# Allegro board INSOLADORA.brd
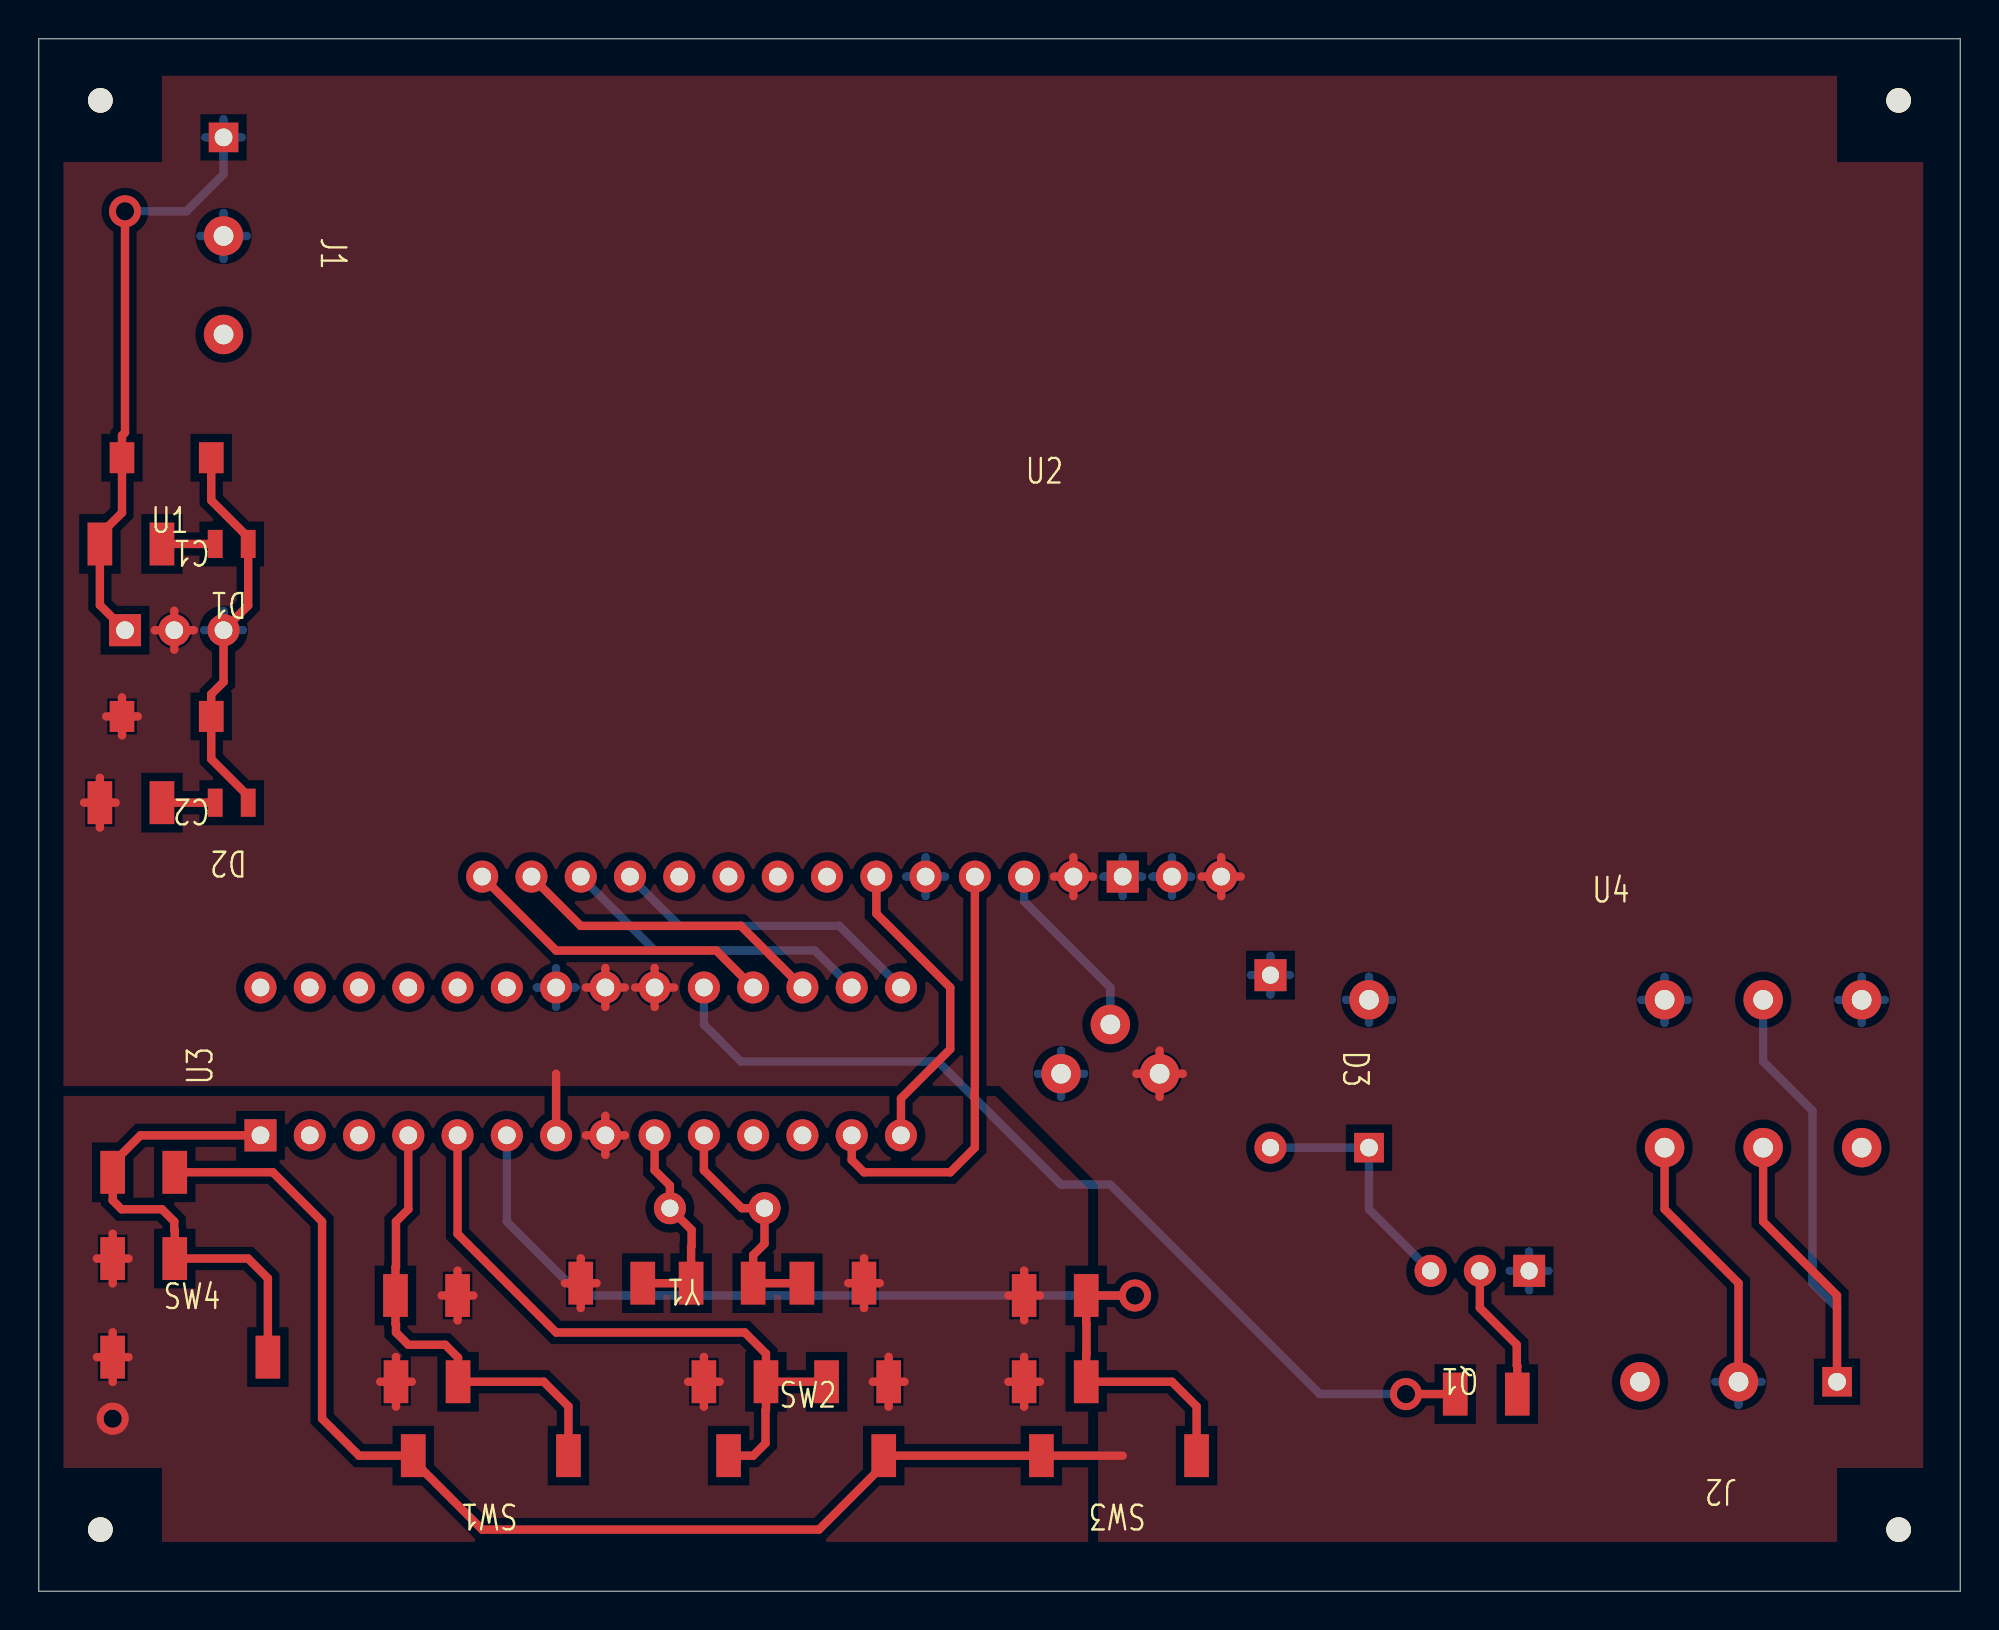
[diagram p0: board, top side]
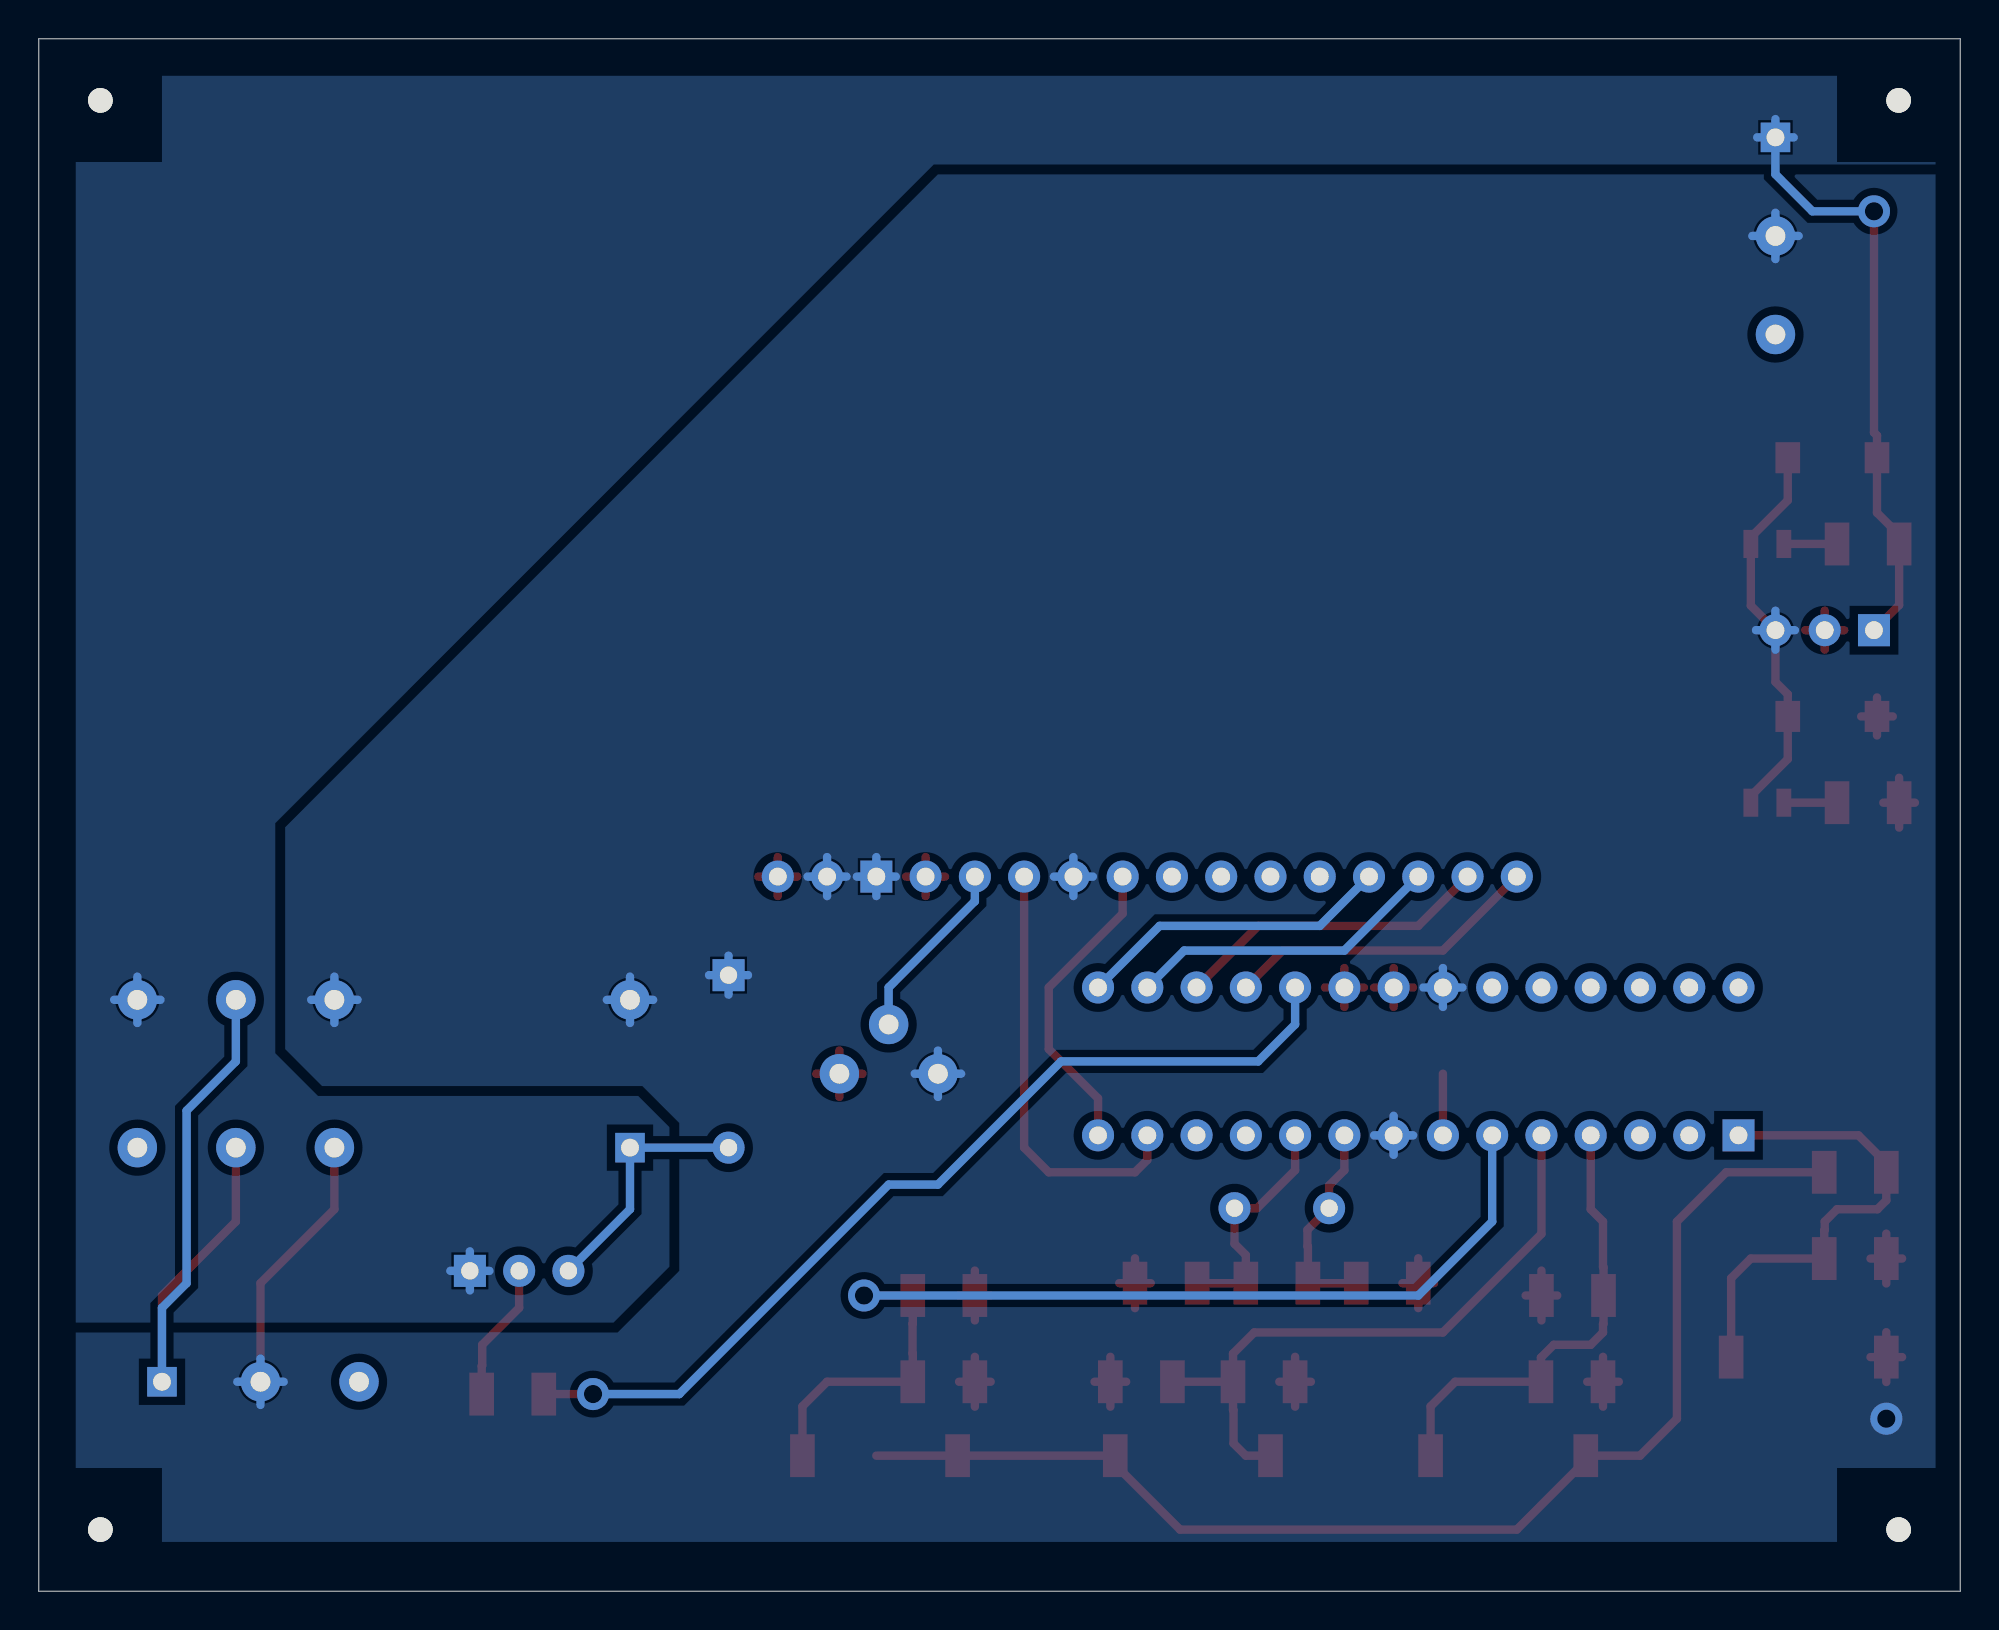
[diagram p1: board, bottom side, seen from below]

Outline 99.06 x 80.01 mm; copper layers: TOP, BOTTOM. Coordinates in mm from the lower left corner of the outline.
Outline path: 0,80.01 99.06,80.01 99.06,0 0,0 0,80.01

## Placement (name value [footprint] x y rotation side)
C1  0.33u  [SMD_CAPHB]  8.89 58.42 180 top
C2  0.1u  [SMD_CAPHB]  8.89 45.09 180 top
C3  100n  [SMDCAP_126X63]  3.81 17.15 0 top
C4  100n  [SMDCAP_126X63]  18.42 10.8 0 top
C5  100n  [SMDCAP_126X63]  43.81 10.8 180 top
C6  100n  [SMDCAP_126X63]  50.8 15.24 0 top
C7  22p  [SMDCAP_126X63]  27.94 15.88 0 top
C8  22p  [SMDCAP_126X63]  42.55 15.88 180 top
D1  1N6266/TO  [SMDLED_67X35]  10.8 53.98 180 top
D2  1N6266/TO  [SMDLED_67X35]  10.8 40.64 180 top
D3  d  [DIODO_350]  63.5 31.75 270 top
J1  POWER  [CON3]  9.52 74.93 270 top
J2  LEDS_UV  [CON3]  92.71 10.8 180 top
NOREF  -  [unnamed]  3.18 3.18 0 top
NOREF#2  -  [unnamed]  95.88 3.18 0 top
NOREF#3  -  [unnamed]  3.18 76.84 0 top
NOREF#4  -  [unnamed]  95.88 76.84 0 top
Q1  -  [BC547B]  76.84 16.51 180 top
R1  1k  [SMDRES_126X63]  6.35 40.64 180 top
R2  1k  [SMDRES_126X63]  6.35 53.98 180 top
R3  10k  [POT_MULTI]  52.7 26.67 0 top
R4  10k  [SMDRES_126X63]  3.81 21.59 0 top
R5  220  [SMDRES_126X63]  21.59 15.24 180 top
R6  220  [SMDRES_126X63]  34.29 10.8 0 top
R7  220  [SMDRES_126X63]  50.8 10.8 0 top
R8  1k  [SMDRES_126X63]  36.83 15.88 180 top
R9  10k  [SMDRES_126X63]  73.03 10.16 0 top
SW1  SW PUSHBUTTON  [SMD_PUSHBUTTON]  27.3 6.98 180 top
SW2  SW PUSHBUTTON  [SMD_PUSHBUTTON]  35.56 6.98 0 top
SW3  SW PUSHBUTTON  [SMD_PUSHBUTTON]  59.69 6.98 180 top
SW4  SW PUSHBUTTON  [SMD_PUSHBUTTON]  3.81 12.07 0 top
U1  LM7805C  [LM7805]  4.45 49.53 0 top
U2  LMB162H  [LMB162H_LCD]  55.88 36.83 0 top
U3  -  [ATMEGA328P]  11.43 23.5 90 top
U4  -  [RZ03_1C4_D005]  68.58 30.48 0 top
Y1  CRYSTAL 16 MHz  [CRISTAL16MHZ]  40.64 21.59 180 top

## Library data of the parts
C1 C2 = C_elect_0
C3-C8 = C
D1 D2 = 1N6266/TO_0
D3 = d_0
J1 J2 = CON3
Q1 = BC547B
R1 R2 R4-R9 = R
R3 = POT
SW1-SW4 = SW PUSHBUTTON
U1 = LM7805C
U2 = LMB162H_LCD_0
U3 = ATMEGA328P
U4 = RZ03_1C4_D005
Y1 = CRYSTAL

## Footprints (pads in the part's own frame, mm; a bottom-side part is the same pattern mirrored in y, then rotated)
ATMEGA328P
  rect 1.651x1.651 hole 0.914: 1(0,0)
  round 1.651 hole 0.914: 2(0,-2.54) 3(0,-5.08) 4(0,-7.62) 5(0,-10.16) 6(0,-12.7) 7(0,-15.24) 8(0,-17.78) 9(0,-20.32) 10(0,-22.86) 11(0,-25.4) 12(0,-27.94) 13(0,-30.48) 14(0,-33.02) 15(7.62,-33.02) 16(7.62,-30.48) 17(7.62,-27.94) 18(7.62,-25.4) 19(7.62,-22.86) 20(7.62,-20.32) 21(7.62,-17.78) 22(7.62,-15.24) 23(7.62,-12.7) 24(7.62,-10.16) 25(7.62,-7.62) 26(7.62,-5.08) 27(7.62,-2.54) 28(7.62,0)
BC547B
  rect 1.651x1.651 hole 0.889: 1(0,0)
  round 1.651 hole 0.889: 2(2.54,0) 3(5.08,0)
CON3
  rect 1.524x1.524 hole 0.914: 1(0,0)
  round 2.032 hole 1.016: 2(5.08,0) 3(10.16,0)
CRISTAL16MHZ
  round 1.651 hole 0.889: 1(3.226,1.85) 2(8.103,1.85)
DIODO_350
  rect 1.651x1.651 hole 0.889: 1(0,0)
  round 1.651 hole 0.889: 2(8.89,0)
LM7805
  rect 1.651x1.651 hole 0.914: 1(0,0)
  round 1.651 hole 0.914: 2(2.54,0) 3(5.08,0)
LMB162H_LCD
  rect 1.651x1.651 hole 0.914: 1(0,0)
  round 1.651 hole 0.914: 2(-2.54,0) 3(-5.08,0) 4(-7.62,0) 5(-10.16,0) 6(-12.7,0) 7(-15.24,0) 8(-17.78,0) 9(-20.32,0) 10(-22.86,0) 11(-25.4,0) 12(-27.94,0) 13(-30.48,0) 14(-33.02,0) 15(5.08,0) 16(2.54,0)
POT_MULTI
  round 2.032 hole 1.016: 1(0,0) 2(2.54,2.54) 3(5.08,0)
RZ03_1C4_D005
  rect 1.524x1.524 hole 0.914: 1(0,-7.62)
  round 2.032 hole 1.016: 2(15.24,-7.62) 3(20.32,-7.62) 4(25.4,-7.62) 5(25.4,0) 6(20.32,0) 7(15.24,0) 8(0,0)
SMD_CAPHB
  rect 1.27x1.6 smd: 1(0,0) 2(4.6,0)
SMD_PUSHBUTTON
  rect 1.27x2.21 smd: 1(0,0) 2(8.001,0)
SMDCAP_126X63
  rect 1.27x2.21 smd: 1(0,0) 2(3.2,0)
SMDLED_67X35
  rect 0.762x1.448 smd: 1(0,0) 2(1.702,0)
SMDRES_126X63
  rect 1.27x2.21 smd: 1(0,0) 2(3.2,0)
unnamed
  round 1.27 hole 3.962 unplated: (0,0)

## Nets
VCC: C2.2(+) R1.2 R3.3(2) R4.2 SW1.2 SW2.2 SW3.2 U1.2(OUT) U2.2(VDD) U2.15(BLK) U3.7(VCC) U3.20(AVCC) U3.21(AREF)
0: C1.1(-) C2.1(-) C3.1 C4.1 C5.1 C6.1 C7.1 C8.1 D1.1(CATHODE) D2.1(CATHODE) D3.1 J1.2 J2.2 R3.1 R5.1 R6.1 R7.1 SW4.1 U1.3(GND) U2.1(VSS) U2.5(R/W) U2.16(BLA) U3.8(GND1) U3.22(GND2) U4.7(12) U4.8(A2)
ATM_RSTN: C3.2 R4.1 SW4.2 U3.1(PC6)
CONTRAST: R3.2(T) U2.3(VO)
DATA_EN: U2.6(E) U3.14(PB0)
DB4: U2.11(DB4) U3.15(PB1)
DB5: U2.12(DB5) U3.16(PB2)
DB6: U2.13(DB6) U3.17(PB3)
DB7: U2.14(DB7) U3.18(PB4)
MIN: C4.2 R5.2 SW1.1 U3.4(PD2)
POWER: C1.2(+) J1.1 Q1.1(C) R2.2 U1.1(IN) U4.5(14)
POWER_LEDS: J2.1 U4.6(11)
REG_SEL: U2.4(RS) U3.13(PD7)
RELAY_CNTRL: R9.1 U3.19(PB5)
RELAY_CURRENT: D3.2 Q1.3(E) U4.1(A1)
SEG: C5.2 R6.2 SW2.1 U3.5(PD3)
START: C6.2 R7.2 SW3.1 U3.6(PD4)
XTAL1: C7.2 R8.2 U3.9(PB6) Y1.2
XTAL2: C8.2 R8.1 U3.10(PB7) Y1.1
N416775: Q1.2(B) R9.2
N4105391: D2.2(ANODE) R1.1
N4184300: D1.2(ANODE) R2.1

Pads without a net: J1 3; J2 3; U2 7 8 9 10; U3 2 3 11 12 23 24 25 26 27 28; U4 2 3 4

## Via types
v1: diameter 1.651, hole 0.94, TOP to BOTTOM, 4 vias

## Routing (per net, layer and track width the routed paths; a pad name or vN(x,y) marks a point on that pad's centre or on a via; arc(x,y) is an arc through that point)
VCC: length 100.3
  TOP w0.432: U1.2 7.99,49.53 ; U1.2 6.98,50.53 ; U1.2 5.98,49.53 ; U1.2 6.98,48.53 ; 59.96,36.83 U2.15 ; U2.15 60.96,35.83 ; U2.15 60.96,37.83 ; U2.15 61.96,36.83 ; 57.79,26.67 58.98,26.67 ; 57.79,26.67 57.79,25.48 ; 57.79,26.67 56.59,26.67 ; 57.79,26.67 57.79,27.86 ; U3.7 26.67,26.67 ; R1.2 3.15,41.92 ; R1.2 3.96,40.64 ; R1.2 3.15,39.36 ; R1.2 2.34,40.64 ; 28.21,31.12 U3.21 ; U3.21 29.21,30.11 ; U3.21 29.21,32.12 ; U3.21 30.21,31.12 ; U2.2 53.34,37.83 ; U2.2 54.34,36.83 ; U2.2 53.34,35.83 ; U2.2 52.34,36.83 ; C2.2 4.29,46.06 ; C2.2 4.29,44.11 ; C2.2 3.48,45.09 ; C2.2 5.1,45.09 ; 55.88,6.98 SW3.2 43.56,6.98 43.56,6.52 40.22,3.18 22.86,3.18 19.3,6.73 SW1.2 16.51,6.98 14.61,8.89 14.61,19.05 12.06,21.59 R4.2 ; U3.20 31.75,32.12 ; U3.20 30.75,31.12 ; U3.20 31.75,30.11 ; U3.20 32.75,31.12
0: length 131.7
  TOP w0.432: C4.1 18.42,12.08 ; C4.1 18.42,9.51 ; C4.1 19.23,10.8 ; C4.1 17.6,10.8 ; 49.99,15.24 C6.1 ; C6.1 50.8,16.52 ; C6.1 51.61,15.24 ; C6.1 50.8,13.96 ; C7.1 27.94,17.16 ; C7.1 28.75,15.88 ; C7.1 27.13,15.88 ; C7.1 27.94,14.59 ; 3.81,15.86 C3.1 ; C3.1 3,17.15 ; C3.1 4.62,17.15 ; C3.1 3.81,18.43 ; 49.99,10.8 R7.1 ; R7.1 51.61,10.8 ; R7.1 50.8,12.08 ; R7.1 50.8,9.51 ; C5.1 44.63,10.8 ; C5.1 43.81,12.08 ; C5.1 43,10.8 ; C5.1 43.81,9.51 ; D2.1 10.8,40.98 8.89,42.89 C2.1 8.89,46.23 9.52,46.86 U1.3 10.8,50.8 D1.1 10.8,54.32 8.89,56.22 C1.1 ; C8.1 43.36,15.88 ; C8.1 42.55,17.16 ; C8.1 42.55,14.59 ; C8.1 41.73,15.88 ; 34.29,9.51 R6.1 ; R6.1 34.29,12.08 ; R6.1 33.48,10.8 ; R6.1 35.1,10.8 ; R5.1 21.59,16.52 ; R5.1 22.4,15.24 ; R5.1 21.59,13.96 ; R5.1 20.78,15.24 ; J2.2 87.63,15.88 83.82,19.69 83.82,22.86 ; SW4.1 3.81,13.35 ; SW4.1 3.81,10.78 ; SW4.1 4.62,12.07 ; SW4.1 3,12.07 ; U3.8 29.21,24.5 ; U3.8 30.21,23.5 ; U3.8 29.21,22.49 ; U3.8 28.21,23.5
  BOTTOM w0.432: 82.63,30.48 U4.7 ; U4.7 83.82,31.67 ; U4.7 83.82,29.29 ; U4.7 85.01,30.48 ; U3.22 26.67,32.12 ; U3.22 26.67,30.11 ; U3.22 27.67,31.12 ; U3.22 25.67,31.12 ; 29.21,22.49 U3.8 ; U3.8 30.21,23.5 ; U3.8 28.21,23.5 ; U3.8 29.21,24.5 ; 8.33,69.85 J1.2 ; J1.2 9.52,71.04 ; J1.2 9.52,68.66 ; J1.2 10.72,69.85 ; 62.5,31.75 D3.1 ; D3.1 63.5,30.75 ; D3.1 64.5,31.75 ; D3.1 63.5,32.75 ; R3.1 53.9,26.67 ; R3.1 51.51,26.67 ; R3.1 52.7,25.48 ; R3.1 52.7,27.86 ; 86.44,10.8 J2.2 ; J2.2 88.82,10.8 ; J2.2 87.63,11.99 ; J2.2 87.63,9.6 ; 67.39,30.48 U4.8 ; U4.8 68.58,29.29 ; U4.8 69.77,30.48 ; U4.8 68.58,31.67 ; 9.52,48.53 U1.3 ; U1.3 9.52,50.53 ; U1.3 8.52,49.53 ; U1.3 10.53,49.53 ; 58.42,35.83 U2.16 ; U2.16 59.42,36.83 ; U2.16 58.42,37.83 ; U2.16 57.42,36.83 ; 54.88,36.83 U2.1 ; U2.1 55.88,37.83 ; U2.1 56.88,36.83 ; U2.1 55.88,35.83 ; U2.5 45.72,37.83 ; U2.5 46.72,36.83 ; U2.5 45.72,35.83 ; U2.5 44.72,36.83
  vias: v1(3.81,8.89)
ATM_RSTN: length 25
  TOP w0.432: U3.1 5.25,23.5 3.81,22.06 R4.1 3.81,20.14 4.27,19.69 6.35,19.69 6.98,19.05 6.98,18.62 7.01,18.59 C3.2 10.8,17.15 11.81,16.13 SW4.2
CONTRAST: length 9.5
  BOTTOM w0.432: U2.3 50.8,35.56 55.25,31.12 R3.2
DATA_EN: length 16
  TOP w0.432: U2.6 43.18,34.93 46.99,31.12 46.99,27.94 44.45,25.4 U3.14
DB4: length 16.3
  BOTTOM w0.432: U2.11 33.02,34.29 41.27,34.29 U3.15
DB5: length 16.3
  BOTTOM w0.432: U3.16 40.01,33.02 31.75,33.02 U2.12
DB6: length 16.3
  TOP w0.432: U3.17 36.2,34.29 27.94,34.29 U2.13
DB7: length 16.3
  TOP w0.432: U2.14 26.67,33.02 34.92,33.02 U3.18
MIN: length 24.2
  TOP w0.432: SW1.1 27.3,9.53 26.04,10.8 C4.2 21.62,12.04 20.96,12.7 19.05,12.7 18.42,13.34 18.42,13.77 18.39,13.79 R5.2 18.39,16.69 18.42,16.71 18.42,19.05 19.05,19.69 U3.4
POWER: length 42.1
  TOP w0.432: v1(4.45,71.12) 4.45,59.72 4.29,59.56 C1.2 4.29,55.59 3.15,54.44 R2.2 3.15,50.83 U1.1
  BOTTOM w0.432: J1.1 9.52,73.03 7.62,71.12 v1(4.45,71.12) ; J1.1 8.58,74.93 ; J1.1 10.47,74.93 ; J1.1 9.52,75.87 ; 93.98,29.29 U4.5 ; U4.5 95.17,30.48 ; U4.5 92.79,30.48 ; U4.5 93.98,31.67 ; 75.83,16.51 Q1.1 ; Q1.1 76.84,15.51 ; Q1.1 76.84,17.51 ; Q1.1 77.84,16.51
POWER_LEDS: length 34.9
  TOP w0.432: J2.1 92.71,15.24 88.9,19.05 88.9,22.86
  BOTTOM w0.432: U4.6 88.9,27.31 91.44,24.77 91.44,15.88 92.71,14.61 J2.1
REG_SEL: length 22.4
  TOP w0.432: U3.13 41.91,22.23 42.55,21.59 46.99,21.59 48.26,22.86 48.26,25.38 48.25,25.43 48.24,25.48 48.24,25.62 48.26,25.7 U2.4
RELAY_CNTRL: length 48.5
  TOP w0.432: R9.1 v1(70.48,10.16)
  BOTTOM w0.432: U3.19 34.29,29.21 36.2,27.31 46.36,27.31 52.7,20.96 55.25,20.96 66.04,10.16 v1(70.48,10.16)
RELAY_CURRENT: length 12.7
  BOTTOM w0.432: Q1.3 68.58,19.69 U4.1 63.5,22.86
SEG: length 33.5
  TOP w0.432: R6.2 37.49,9.35 37.47,9.32 37.47,7.62 36.83,6.98 SW2.1 ; R6.2 C5.2 ; R6.2 37.49,12.24 36.4,13.34 26.67,13.34 21.59,18.42 U3.5
START: length 54.1
  TOP w0.432: SW3.1 59.69,9.53 58.42,10.8 R7.2 54,12.24 54.01,12.26 54.01,13.78 54,13.79 C6.2 v1(56.52,15.24)
  BOTTOM w0.432: v1(56.52,15.24) 27.94,15.24 24.13,19.05 U3.6
XTAL1: length 10.9
  TOP w0.432: U3.9 31.75,21.7 32.54,20.91 Y1.2 33.66,18.62 33.66,17.78 33.63,17.75 R8.2 C7.2
XTAL2: length 12.4
  TOP w0.432: C8.2 R8.1 36.83,17.32 37.41,17.91 Y1.1 36.25,19.74 34.29,21.7 U3.10
N416775: length 7.1
  TOP w0.432: Q1.2 74.3,14.61 76.2,12.7 76.2,11.63 76.23,11.61 R9.2
N4105391: length 2.7
  TOP w0.432: R1.1 D2.2
N4184300: length 2.7
  TOP w0.432: R2.1 D1.2

## Copper pours and planes (outline as drawn; the poured copper is in the pictures)
VCC on TOP: 1.27,26.04 1.27,78.1 97.15,78.1 97.15,26.04 97.16,13.97 97.16,2.54 54.61,2.54 54.61,20.96 49.53,26.04 ; 2 cut-outs
0 on TOP: 1.27,2.54 1.27,13.97 1.27,13.97 1.27,26.04 49.53,26.04 54.61,20.96 54.61,2.54 53.34,2.54
0 on BOTTOM: 2.54,2.54 1.27,2.54 1.27,73.03 52.7,73.03 86.36,39.37 86.36,27.94 84.45,26.04 67.94,26.04 66.04,24.13 66.04,16.51 69.22,13.34 97.16,13.34 97.16,2.54 96.52,2.54 ; 5 cut-outs
POWER on BOTTOM: 86.36,27.94 86.36,39.37 52.7,73.03 1.27,73.03 1.27,78.1 97.15,78.1 97.15,17.15 97.16,13.34 69.22,13.34 66.04,16.51 66.04,24.13 67.94,26.04 84.45,26.04
